# EAGLE board CT_schematic (EAGLE 7.6.0)

Size 100 x 80 mm. Coordinates in mm from the lower left corner, seen from the top.
Outline: 0,0 100,0 100,80 0,80 0,0
Copper layers (1*16): Top 0.035mm / dielectric 1.5mm / Bottom 0.035mm
Design rules "default": minimum track width 10mil, minimum drill 24mil, track to track 8mil, track to pad 8mil, pad to pad 8mil, via to via 8mil, smd to smd 8mil, copper to edge 40mil, drill to drill 8mil, minimum pad ring 10mil, minimum via ring 8mil, stop-mask expansion 4mil, vias tented up to drill 0mil, thermal gap 10mil

## Footprints (pad centres in the part's own frame; a part is rotated, then mirrored left to right if it is on the bottom)
C0603 = smd 0.8 x 0.8: 1 -0.762,0; 2 0.762,0
C0402 = smd 0.5 x 0.5: 1 -0.508,0; 2 0.508,0
C0805 = smd 1.2 x 1.3: 1 -1.016,0; 2 1.016,0
C1210 = smd 1.2 x 2.5: 1 -1.524,0; 2 1.524,0
C1206 = smd 1.3 x 1.6: 1 -1.524,0; 2 1.524,0
EXV-9H = smd 3.505 x 1.676: 1 -2.857,0; 2 2.857,0
L0603 = smd 0.8 x 0.8: 1 -0.762,0; 2 0.762,0
L1210 = smd 1.2 x 2.5: 1 -1.524,0; 2 1.524,0
PJ-037B_PACKAGE = drill 3.7 square: 1 12,0 | drill 3.2 square: 2 6,0
R0603 = smd 0.8 x 0.8: 1 -0.762,0; 2 0.762,0
WLCSP168 = smd 0.2 x 0.2: A1 -2.2,2.6; A2 -1.8,2.6; A3 -1.4,2.6; A4 -1,2.6; A5 -0.6,2.6; A6 -0.2,2.6; A7 0.2,2.6; A8 0.6,2.6; A9 1,2.6; A10 1.4,2.6; A11 1.8,2.6; A12 2.2,2.6; B1 -2.2,2.2; B2 -1.8,2.2; B3 -1.4,2.2; B4 -1,2.2; B5 -0.6,2.2; B6 -0.2,2.2; B7 0.2,2.2; B8 0.6,2.2; B9 1,2.2; B10 1.4,2.2; B11 1.8,2.2; B12 2.2,2.2; C1 -2.2,1.8; C2 -1.8,1.8; C3 -1.4,1.8; C4 -1,1.8; C5 -0.6,1.8; C6 -0.2,1.8; C7 0.2,1.8; C8 0.6,1.8; C9 1,1.8; C10 1.4,1.8; C11 1.8,1.8; C12 2.2,1.8; D1 -2.2,1.4; D2 -1.8,1.4; D3 -1.4,1.4; D4 -1,1.4; D5 -0.6,1.4; D6 -0.2,1.4; D7 0.2,1.4; D8 0.6,1.4; D9 1,1.4; D10 1.4,1.4; D11 1.8,1.4; D12 2.2,1.4; E1 -2.2,1; E2 -1.8,1; E3 -1.4,1; E4 -1,1; E5 -0.6,1; E6 -0.2,1; E7 0.2,1; E8 0.6,1; E9 1,1; E10 1.4,1; E11 1.8,1; E12 2.2,1; F1 -2.2,0.6; F2 -1.8,0.6; F3 -1.4,0.6; F4 -1,0.6; F5 -0.6,0.6; F6 -0.2,0.6; F7 0.2,0.6; F8 0.6,0.6; F9 1,0.6; F10 1.4,0.6; F11 1.8,0.6; F12 2.2,0.6; G1 -2.2,0.2; G2 -1.8,0.2; G3 -1.4,0.2; G4 -1,0.2; G5 -0.6,0.2; G6 -0.2,0.2; G7 0.2,0.2; G8 0.6,0.2; G9 1,0.2; G10 1.4,0.2; G11 1.8,0.2; G12 2.2,0.2; H1 -2.2,-0.2; H2 -1.8,-0.2; H3 -1.4,-0.2; H4 -1,-0.2; H5 -0.6,-0.2; H6 -0.2,-0.2; H7 0.2,-0.2; H8 0.6,-0.2; H9 1,-0.2; H10 1.4,-0.2; H11 1.8,-0.2; H12 2.2,-0.2; J1 -2.2,-0.6; J2 -1.8,-0.6; J3 -1.4,-0.6; J4 -1,-0.6; J5 -0.6,-0.6; J6 -0.2,-0.6; J7 0.2,-0.6; J8 0.6,-0.6; J9 1,-0.6; J10 1.4,-0.6; J11 1.8,-0.6; J12 2.2,-0.6; K1 -2.2,-1; K2 -1.8,-1; K3 -1.4,-1; K4 -1,-1; K5 -0.6,-1; K6 -0.2,-1; K7 0.2,-1; K8 0.6,-1; K9 1,-1; K10 1.4,-1; K11 1.8,-1; K12 2.2,-1; L1 -2.2,-1.4; L2 -1.8,-1.4; L3 -1.4,-1.4; L4 -1,-1.4; L5 -0.6,-1.4; L6 -0.2,-1.4; L7 0.2,-1.4; L8 0.6,-1.4; L9 1,-1.4; L10 1.4,-1.4; L11 1.8,-1.4; L12 2.2,-1.4; M1 -2.2,-1.8; M2 -1.8,-1.8; M3 -1.4,-1.8; M4 -1,-1.8; M5 -0.6,-1.8; M6 -0.2,-1.8; M7 0.2,-1.8; M8 0.6,-1.8; M9 1,-1.8; M10 1.4,-1.8; M11 1.8,-1.8; M12 2.2,-1.8; N1 -2.2,-2.2; N2 -1.8,-2.2; N3 -1.4,-2.2; N4 -1,-2.2; N5 -0.6,-2.2; N6 -0.2,-2.2; N7 0.2,-2.2; N8 0.6,-2.2; N9 1,-2.2; N10 1.4,-2.2; N11 1.8,-2.2; N12 2.2,-2.2; P1 -2.2,-2.6; P2 -1.8,-2.6; P3 -1.4,-2.6; P4 -1,-2.6; P5 -0.6,-2.6; P6 -0.2,-2.6; P7 0.2,-2.6; P8 0.6,-2.6; P9 1,-2.6; P10 1.4,-2.6; P11 1.8,-2.6; P12 2.2,-2.6
WSON-6 = smd 0.4 x 0.6: 1 -1,-1.4; 2 0,-1.4; 3 1,-1.4; 4 1,1.4; 5 0,1.4; 6 -1,1.4 | drill 0.2 pad 0.3: P$1 0.95,0; P$2 -0.95,0; P$3 0,-0.5; P$4 0,0.5 | smd 2.4 x 1.5: PAD 0,0
SSOP-20 = smd 1.651 x 0.432: 1 -3.48,2.925; 2 -3.48,2.275; 3 -3.48,1.625; 4 -3.48,0.975; 5 -3.48,0.325; 6 -3.48,-0.325; 7 -3.48,-0.975; 8 -3.48,-1.625; 9 -3.48,-2.275; 10 -3.48,-2.925; 11 3.48,-2.925; 12 3.48,-2.275; 13 3.48,-1.625; 14 3.48,-0.975; 15 3.48,-0.325; 16 3.48,0.325; 17 3.48,0.975; 18 3.48,1.625; 19 3.48,2.275; 20 3.48,2.925
HTSS-105-01-G-D = drill 1 pad 1.8 square: 1 0,0 | drill 1 pad 1.8: 2 0,2.54; 3 2.54,0; 4 2.54,2.54; 5 5.08,0; 6 5.08,2.54; 7 7.62,0; 8 7.62,2.54; 9 10.16,0; 10 10.16,2.54
LBGA-64 = smd 0.559 x 0.559: A1 -3.5,3.5; A2 -2.5,3.5; A3 -1.5,3.5; A4 -0.5,3.5; A5 0.5,3.5; A6 1.5,3.5; A7 2.5,3.5; A8 3.5,3.5; B1 -3.5,2.5; B2 -2.5,2.5; B3 -1.5,2.5; B4 -0.5,2.5; B5 0.5,2.5; B6 1.5,2.5; B7 2.5,2.5; B8 3.5,2.5; C1 -3.5,1.5; C2 -2.5,1.5; C3 -1.5,1.5; C4 -0.5,1.5; C5 0.5,1.5; C6 1.5,1.5; C7 2.5,1.5; C8 3.5,1.5; D1 -3.5,0.5; D2 -2.5,0.5; D3 -1.5,0.5; D4 -0.5,0.5; D5 0.5,0.5; D6 1.5,0.5; D7 2.5,0.5; D8 3.5,0.5; E1 -3.5,-0.5; E2 -2.5,-0.5; E3 -1.5,-0.5; E4 -0.5,-0.5; E5 0.5,-0.5; E6 1.5,-0.5; E7 2.5,-0.5; E8 3.5,-0.5; F1 -3.5,-1.5; F2 -2.5,-1.5; F3 -1.5,-1.5; F4 -0.5,-1.5; F5 0.5,-1.5; F6 1.5,-1.5; F7 2.5,-1.5; F8 3.5,-1.5; G1 -3.5,-2.5; G2 -2.5,-2.5; G3 -1.5,-2.5; G4 -0.5,-2.5; G5 0.5,-2.5; G6 1.5,-2.5; G7 2.5,-2.5; G8 3.5,-2.5; H1 -3.5,-3.5; H2 -2.5,-3.5; H3 -1.5,-3.5; H4 -0.5,-3.5; H5 0.5,-3.5; H6 1.5,-3.5; H7 2.5,-3.5; H8 3.5,-3.5
RHB32_3P45X3P45 = smd 0.85 x 0.28: 1 -2.475,1.75; 2 -2.475,1.25; 3 -2.475,0.75; 4 -2.475,0.25; 5 -2.475,-0.25; 6 -2.475,-0.75; 7 -2.475,-1.25; 8 -2.475,-1.75; 17 2.475,-1.75; 18 2.475,-1.25; 19 2.475,-0.75; 20 2.475,-0.25; 21 2.475,0.25; 22 2.475,0.75; 23 2.475,1.25; 24 2.475,1.75 | smd 0.28 x 0.85: 9 -1.75,-2.475; 10 -1.25,-2.475; 11 -0.75,-2.475; 12 -0.25,-2.475; 13 0.25,-2.475; 14 0.75,-2.475; 15 1.25,-2.475; 16 1.75,-2.475; 25 1.75,2.475; 26 1.25,2.475; 27 0.75,2.475; 28 0.25,2.475; 29 -0.25,2.475; 30 -0.75,2.475; 31 -1.25,2.475; 32 -1.75,2.475 | smd 3.45 x 3.45: 33 0,0
MICRO_USB_AB = smd 0.4 x 1.35: 1 1.3,0.26; 2 0.65,0.26; 3 0,0.26; 4 -0.65,0.26; 5 -1.3,0.26 | drill 0.6 pad 0.95 long: 6 4.175,-2.54; 7 -4.175,-2.54 | drill 0.7 pad 1.1 long: 8 -2.225,0.46; 9 2.225,0.46
SOT143B = smd 1 x 0.7: 1 -0.75,-1 | smd 0.6 x 0.7: 2 0.95,-1; 3 0.95,1; 4 -0.95,1
SOT-23-6 = smd 1.1 x 0.6: 1 -1.4,0.95; 2 -1.4,0; 3 -1.4,-0.95; 4 1.4,-0.95; 5 1.4,0; 6 1.4,0.95
QFN-28 = smd 0.813 x 0.305: 1 -2.451,1.5; 2 -2.451,1; 3 -2.451,0.5; 4 -2.451,0; 5 -2.451,-0.5; 6 -2.451,-1; 7 -2.451,-1.5; 15 2.451,-1.5; 16 2.451,-1; 17 2.451,-0.5; 18 2.451,0; 19 2.451,0.5; 20 2.451,1; 21 2.451,1.5 | smd 0.305 x 0.813: 8 -1.5,-2.451; 9 -1,-2.451; 10 -0.5,-2.451; 11 0,-2.451; 12 0.5,-2.451; 13 1,-2.451; 14 1.5,-2.451; 22 1.5,2.451; 23 1,2.451; 24 0.5,2.451; 25 0,2.451; 26 -0.5,2.451; 27 -1,2.451; 28 -1.5,2.451 | smd 3.607 x 3.607: 29 0,0
SJ-43515TS-SMT-TR = smd 2.2 x 3: 1 0.6,-7.4; 4 3.4,-7.4 | smd 3 x 3: 2 12.8,-7.4; 5 17,-3 | smd 2 x 3: 3 5.3,0; 6 2.5,0 | drill 1.8: P$7 4.5,-3.69; P$8 11.54,-3.69
ABLS-12.288MHZ-B4-T = smd 5.6 x 2.8: 1 -3.81,0; 2 5.69,0
ASEK = smd 1.4 x 1: 1 -1.1,-0.8; 2 1.1,-0.8; 3 1.1,0.8; 4 -1.1,0.8
ASFL1 = smd 1.7 x 1.5: 1 -1.27,-1.1; 2 1.27,-1.1; 3 1.27,1.1; 4 -1.27,1.1
WSON-8 = smd 0.3 x 0.6: 1 -0.75,0; 2 0.05,0; 3 0.85,0; 4 1.65,0; 5 1.65,3.8; 6 0.85,3.8; 7 0.05,3.8; 8 -0.75,3.8 | smd 3 x 2.6: PAD 0.45,1.9
SON-6 = smd 0.55 x 0.3: 1 -0.355,0.5 | smd 0.52 x 0.3: 2 -0.37,0; 3 -0.37,-0.5; 4 0.37,-0.5; 5 0.37,0; 6 0.37,0.5
SW_4-1437565-2 = smd 1.4 x 2.1: 1 -2.23,4.55; 2 -2.23,-4.55; 3 2.23,4.55; 4 2.23,-4.55
LGM67K-G1J2-24-Z = smd 0.8 x 1.4: A -2,0; C 0,0
NC7SZ125M5X = smd 1.3 x 0.7: 1 -1.3,0.95; 2 -1.3,0; 3 -1.3,-0.95; 4 1.3,-0.95; 5 1.3,0.95

## Placement (x,y rotation side)
C1  1e-06  [C0603]  -63.5,78.74 0 top  (outside the outline)
C2  1e-07  [C0603]  -67.31,78.74 0 top  (outside the outline)
C3  1e-07  [C0603]  -71.12,78.74 0 top  (outside the outline)
C4  1e-07  [C0603]  -74.93,78.74 0 top  (outside the outline)
C5  1e-07  [C0603]  -78.74,78.74 0 top  (outside the outline)
C6  1e-07  [C0603]  -82.55,78.74 0 top  (outside the outline)
C7  1e-07  [C0603]  -86.36,78.74 0 top  (outside the outline)
C8  1e-07  [C0603]  -15.24,83.82 0 top  (outside the outline)
C9  1e-07  [C0603]  -19.05,83.82 0 top  (outside the outline)
C10  1e-07  [C0603]  -22.86,83.82 0 top  (outside the outline)
C11  1e-07  [C0603]  -26.67,83.82 0 top  (outside the outline)
C12  4.7e-06  [C0603]  -44.45,78.74 0 top  (outside the outline)
C13  2.2e-06  [C0603]  -48.26,78.74 0 top  (outside the outline)
C14  2.2e-06  [C0603]  -52.07,78.74 0 top  (outside the outline)
C15  1e-08  [C0603]  -30.48,83.82 0 top  (outside the outline)
C16  1e-06  [C0603]  -34.29,83.82 0 top  (outside the outline)
C17  1e-07  [C0603]  -38.1,83.82 0 top  (outside the outline)
C18  1e-08  [C0402]  -43.18,88.9 0 top  (outside the outline)
C19  1e-06  [C0603]  -41.91,83.82 0 top  (outside the outline)
C20  1e-06  [C0603]  -45.72,83.82 0 top  (outside the outline)
C21  1e-06  [C0603]  -49.53,83.82 0 top  (outside the outline)
C22  4.7e-06  [C0805]  -27.94,68.58 0 top  (outside the outline)
C23  1e-08  [C0402]  -46.99,88.9 0 top  (outside the outline)
C24  1e-08  [C0402]  -50.8,88.9 0 top  (outside the outline)
C25  1e-07  [C0402]  -54.61,88.9 0 top  (outside the outline)
C26  2.2e-06  [C0603]  -55.88,78.74 0 top  (outside the outline)
C27  1e-07  [C0402]  -58.42,88.9 0 top  (outside the outline)
C28  1e-07  [C0402]  -62.23,88.9 0 top  (outside the outline)
C29  2.2e-06  [C0603]  -59.69,78.74 0 top  (outside the outline)
C30  1e-06  [C0603]  -53.34,83.82 0 top  (outside the outline)
C31  2.2e-05  [C1210]  -38.1,62.23 0 top  (outside the outline)
C32  2.2e-05  [C1210]  -44.45,62.23 0 top  (outside the outline)
C33  1e-09  [C0402]  -66.04,88.9 0 top  (outside the outline)
C34  1e-09  [C0402]  -69.85,88.9 0 top  (outside the outline)
C35  1e-07  [C0402]  -73.66,88.9 0 top  (outside the outline)
C36  1e-07  [C0402]  -77.47,88.9 0 top  (outside the outline)
C37  1e-07  [C0402]  -81.28,88.9 0 top  (outside the outline)
C38  1e-07  [C0402]  -85.09,88.9 0 top  (outside the outline)
C39  1e-07  [C0402]  -88.9,88.9 0 top  (outside the outline)
C40  1e-05  [C0805]  -33.02,68.58 0 top  (outside the outline)
C41  1e-05  [C0805]  -38.1,68.58 0 top  (outside the outline)
C42  1e-05  [C0805]  -43.18,68.58 0 top  (outside the outline)
C43  1e-05  [C0805]  -48.26,68.58 0 top  (outside the outline)
C44  1e-05  [C0805]  -53.34,68.58 0 top  (outside the outline)
C45  2.2e-11  [C0402]  -35.56,88.9 0 top  (outside the outline)
C46  2.2e-11  [C0402]  -39.37,88.9 0 top  (outside the outline)
C47  1e-08  [C0402]  -15.24,93.98 0 top  (outside the outline)
C48  1e-08  [C0402]  -19.05,93.98 0 top  (outside the outline)
C49  1e-08  [C0402]  -22.86,93.98 0 top  (outside the outline)
C50  1e-06  [C0603]  -57.15,83.82 0 top  (outside the outline)
C51  1e-05  [C0805]  -58.42,68.58 0 top  (outside the outline)
C52  1e-08  [C0402]  -26.67,93.98 0 top  (outside the outline)
C53  1e-05  [C1206]  -69.85,60.96 0 top  (outside the outline)
C54  1e-05  [C1210]  -50.8,62.23 0 top  (outside the outline)
C55  1e-08  [C0402]  -30.48,93.98 0 top  (outside the outline)
C56  1e-05  [C1206]  -76.2,60.96 0 top  (outside the outline)
C57  1e-05  [C1210]  -57.15,62.23 0 top  (outside the outline)
C58  1e-07  [C0402]  -34.29,93.98 0 top  (outside the outline)
C59  0.0001  [EXV-9H]  -38.1,54.61 0 top  (outside the outline)
C60  0.0001  [EXV-9H]  -49.53,54.61 0 top  (outside the outline)
C61  1e-08  [C0402]  -38.1,93.98 0 top  (outside the outline)
C62  1e-08  [C0402]  -41.91,93.98 0 top  (outside the outline)
C63  1e-08  [C0402]  -45.72,93.98 0 top  (outside the outline)
F1  240.0  [L0603]  -60.96,83.82 0 top  (outside the outline)
I1  1.5e-05  [L1210]  -63.5,62.23 0 top  (outside the outline)
J1  PJ-037B  [PJ-037B_PACKAGE]  -27.94,24.13 0 top  (outside the outline)
R2  1000.0  [R0603]  -64.77,83.82 0 top  (outside the outline)
R4  4700.0  [R0603]  -68.58,83.82 0 top  (outside the outline)
R5  4700.0  [R0603]  -72.39,83.82 0 top  (outside the outline)
R6  4700.0  [R0603]  -76.2,83.82 0 top  (outside the outline)
R7  2200.0  [R0603]  -80.01,83.82 0 top  (outside the outline)
R8  2200.0  [R0603]  -83.82,83.82 0 top  (outside the outline)
R9  10000.0  [R0603]  -35.56,73.66 0 top  (outside the outline)
R10  10000.0  [R0603]  -40.64,73.66 0 top  (outside the outline)
R11  10000.0  [R0603]  -45.72,73.66 0 top  (outside the outline)
R12  100000.0  [R0603]  -63.5,68.58 0 top  (outside the outline)
R13  100000.0  [R0603]  -68.58,68.58 0 top  (outside the outline)
R14  100000.0  [R0603]  -73.66,68.58 0 top  (outside the outline)
R15  10000.0  [R0603]  -50.8,73.66 0 top  (outside the outline)
R16  10000.0  [R0603]  -55.88,73.66 0 top  (outside the outline)
R17  10000.0  [R0603]  -60.96,73.66 0 top  (outside the outline)
R18  10000.0  [R0603]  -66.04,73.66 0 top  (outside the outline)
R19  10000.0  [R0603]  -71.12,73.66 0 top  (outside the outline)
R20  47000.0  [R0603]  -76.2,73.66 0 top  (outside the outline)
R21  10000.0  [R0603]  -81.28,73.66 0 top  (outside the outline)
R22  10000.0  [R0603]  -86.36,73.66 0 top  (outside the outline)
R23  47000.0  [R0603]  -15.24,78.74 0 top  (outside the outline)
R24  47000.0  [R0603]  -20.32,78.74 0 top  (outside the outline)
R25  47000.0  [R0603]  -25.4,78.74 0 top  (outside the outline)
R26  680.0  [R0603]  -87.63,83.82 0 top  (outside the outline)
R27  100000.0  [R0603]  -78.74,68.58 0 top  (outside the outline)
R28  36000.0  [R0603]  -30.48,78.74 0 top  (outside the outline)
R29  100000.0  [R0603]  -83.82,68.58 0 top  (outside the outline)
R30  100000.0  [R0603]  -15.24,73.66 0 top  (outside the outline)
R31  2231.0  [R0603]  -15.24,88.9 0 top  (outside the outline)
R32  1000.0  [R0603]  -19.05,88.9 0 top  (outside the outline)
R33  100000.0  [R0603]  -20.32,73.66 0 top  (outside the outline)
R34  3900.0  [R0603]  -22.86,88.9 0 top  (outside the outline)
R35  1000.0  [R0603]  -26.67,88.9 0 top  (outside the outline)
R36  10000.0  [R0603]  -35.56,78.74 0 top  (outside the outline)
R37  10000.0  [R0603]  -40.64,78.74 0 top  (outside the outline)
R38  9100.0  [R0603]  -30.48,88.9 0 top  (outside the outline)
R39  680000.0  [R0603]  -25.4,73.66 0 top  (outside the outline)
R40  120000.0  [R0603]  -30.48,73.66 0 top  (outside the outline)
U1  STM32F469AGY6TR  [WLCSP168]  -76.2,21.59 0 top  (outside the outline)
U2  HDC1080DMBR  [WSON-6]  -68.58,45.72 0 top  (outside the outline)
U3  MAX3218EAP+T  [SSOP-20]  -36.83,35.56 0 top  (outside the outline)
U4  HTSS-105-01-G-D  [HTSS-105-01-G-D]  -27.94,35.56 0 top  (outside the outline)
U5  mt28ew512aba1HPC-0AAT  [LBGA-64]  -19.05,7.62 0 top  (outside the outline)
U6  TUSB1210BRHBR  [RHB32_3P45X3P45]  -78.74,54.61 0 top  (outside the outline)
U7  47590-0001  [MICRO_USB_AB]  -36.83,24.13 0 top  (outside the outline)
U8  prtr5v0u2ax  [SOT143B]  -58.42,93.98 0 top  (outside the outline)
U9  MAX4995AAUT+T  [SOT-23-6]  -81.28,60.96 0 top  (outside the outline)
U10  WM8731CLSEFL  [QFN-28]  -30.48,62.23 0 top  (outside the outline)
U11  SJ-43515TS-SMT-TR  [SJ-43515TS-SMT-TR]  -53.34,10.16 0 top  (outside the outline)
U12  SJ-43515TS-SMT-TR  [SJ-43515TS-SMT-TR]  -81.28,10.16 0 top  (outside the outline)
U13  ABLS-12.288MHZ-B4-T  [ABLS-12.288MHZ-B4-T]  -67.31,54.61 0 top  (outside the outline)
U14  ASEK-32.768KHz-ECST  [ASEK]  -29.21,54.61 0 top  (outside the outline)
U15  ASFL1-25MHZ-NCS  [ASFL1]  -45.72,45.72 0 top  (outside the outline)
U16  ASFL1-26MHZ-NCS  [ASFL1]  -62.23,45.72 0 top  (outside the outline)
U17  LP2951ACSDX/NOPB  [WSON-8]  -29.21,44.45 0 top  (outside the outline)
U18  LP3878SDX-ADJ/NOPB  [WSON-8]  -59.69,34.29 0 top  (outside the outline)
U19  LP3878SDX-ADJ/NOPB  [WSON-8]  -80.01,34.29 0 top  (outside the outline)
U20  TPS3895ADRYR  [SON-6]  -62.23,92.71 0 top  (outside the outline)
U21  4-1437565-2  [SW_4-1437565-2]  -57.15,22.86 0 top  (outside the outline)
U22  Q65110A2395  [LGM67K-G1J2-24-Z]  -17.78,62.23 0 top  (outside the outline)
U23  nc7sz125m5x  [NC7SZ125M5X]  -86.36,60.96 0 top  (outside the outline)
U24  nc7sz125m5x  [NC7SZ125M5X]  -15.24,67.31 0 top  (outside the outline)
U25  nc7sz125m5x  [NC7SZ125M5X]  -21.59,67.31 0 top  (outside the outline)

## Library data of the parts
C1-C63 F1 I1 J1 R2 R4-R40 U1-U25 = circuit_tree

## Nets
CLK_CRYSTAL_U10_1: C45.1 U10.1 U13.1
CLK_CRYSTAL_U10_2: C46.1 U10.2 U13.2
CLK_U1_E11: U1.E11 U14.3
CLK_U1_K11: U1.K11 U15.3
CLK_U6_1: U6.1 U16.3
GND: C1.2 C2.2 C3.2 C4.2 C5.2 C6.2 C7.2 C8.2 C9.2 C10.2 C11.2 C12.2 C13.2 C14.2 C15.2 C16.2 C17.2 C18.2 C19.2 C20.2 C21.2 C23.2 C24.2 C25.2 C26.2 C27.2 C28.2 C29.2 C30.2 C34.2 C35.2 C36.2 C37.2 C38.2 C39.2 C40.2 C41.2 C42.2 C43.2 C44.2 C45.2 C46.2 C47.2 C48.2 C49.2 C50.2 C51.2 C52.2 C53.2 C54.2 C55.2 C56.2 C57.2 C58.2 C59.2 C60.2 C61.2 C62.2 C63.2 J1.2 R2.2 R20.2 R23.2 R24.2 R25.2 R29.2 R32.2 R35.2 R38.2 R40.2 U1.A4 U1.B7 U1.B10 U1.C1 U1.F2 U1.F12 U1.H1 U1.H7 U1.J11 U1.L11 U1.M1 U1.N8 U1.N11 U1.P4 U2.2 U2.PAD U3.5 U3.17 U3.20 U4.9 U5.E8 U5.H2 U5.H7 U6.33 U7.5 U7.6 U7.7 U7.8 U7.9 U8.1 U9.2 U10.4 U10.15 U10.19 U10.25 U10.26 U10.29 U11.1 U12.1 U14.2 U15.2 U16.2 U17.3 U17.4 U17.PAD U18.3 U18.PAD U19.3 U19.PAD U20.2 U22.C U23.1 U23.3 U24.1 U24.3 U25.1 U25.3
NET_U1_A9: R8.1 U1.A9 U2.1
NET_U1_B9: R7.1 U1.B9 U2.6
NET_U1_D2: C14.1 U1.D2
NET_U1_D9: R9.1 U1.D9
NET_U1_F8: R10.1 U1.F8
NET_U1_H9: R5.1 U1.H9 U24.4
NET_U1_K1: U1.K1
NET_U1_K2: U1.K2
NET_U1_M12: C15.1 C16.1 F1.1 U1.M12
NET_U1_N4: C13.1 U1.N4
NET_U1_P9: R11.1 U1.P9
NET_U1_P10: U22.A
NET_U1_P11: U21.3 U21.4
NET_U3_1: I1.1 U3.1
NET_U3_2: R12.1 U3.2
NET_U3_3: R13.1 U3.3
NET_U3_4: R14.1 U3.4
NET_U3_15: C21.1 U3.15
NET_U3_16: C22.2 U3.16
NET_U3_18: C22.1 U3.18
NET_U3_19: C20.1 U3.19
NET_U4_3: U3.12 U4.3
NET_U4_4: U3.11 U4.4
NET_U4_5: U3.14 U4.5
NET_U4_6: U3.13 U4.6
NET_U5_B4: R18.1 U5.B4
NET_U5_B5: R4.1 U5.B5 U23.4
NET_U6_11: R21.1 U6.11
NET_U6_12: C29.1 U6.12
NET_U6_14: R22.1 U6.14
NET_U6_20: C26.1 U6.20
NET_U6_27: R6.1 U6.27 U25.4
NET_U7_1: C30.1 U6.22 U7.1 U8.4 U9.1
NET_U7_2: U6.19 U7.2 U8.3
NET_U7_3: U6.18 U7.3 U8.2
NET_U7_4: U6.23 U7.4
NET_U9_3: R20.1 U9.3
NET_U9_4: U6.17 U9.4
NET_U10_9: U10.9
NET_U10_20: C39.1 C44.1 U10.20
NET_U11_2: C32.1 R24.1 U11.2
NET_U11_5: C31.1 R23.1 U11.5
NET_U11_13: C31.2
NET_U11_14: C32.2
NET_U12_5: C33.1 C34.1 R25.1 R26.1 U12.5
NET_U12_21: R26.2
NET_U12_22: C33.2
NET_U17_5: R27.1 U17.5
NET_U17_7: R28.2 R29.1 U17.7
NET_U18_1: C52.1 U18.1
NET_U18_6: R31.2 R32.1 U18.6
NET_U18_8: R30.1 U18.8
NET_U19_1: C55.1 U19.1
NET_U19_6: R34.2 R35.1 U19.6
NET_U19_8: R33.1 U19.8
NET_U20_1: R37.1 R38.1 U20.1
NET_U20_3: R39.2 R40.1 U20.3
NET_U20_4: R36.1 U20.4 U23.2 U24.2 U25.2
NET_U21_1: R2.1 U21.1 U21.2
PROC_FMC_A0: U1.G10 U5.E2
PROC_FMC_A1: U1.H10 U5.D2
PROC_FMC_A2: U1.G12 U5.C2
PROC_FMC_A3: U1.H11 U5.A2
PROC_FMC_A4: U1.J10 U5.B2
PROC_FMC_A5: U1.H12 U5.D3
PROC_FMC_A6: U1.M8 U5.C3
PROC_FMC_A7: U1.J7 U5.A3
PROC_FMC_A8: U1.L7 U5.B6
PROC_FMC_A9: U1.H8 U5.A6
PROC_FMC_A10: U1.J6 U5.C6
PROC_FMC_A11: U1.P7 U5.D6
PROC_FMC_A12: U1.G5 U5.B7
PROC_FMC_A13: U1.G4 U5.A7
PROC_FMC_A14: U1.G2 U5.C7
PROC_FMC_A15: U1.G1 U5.D7
PROC_FMC_A16: U1.J4 U5.E7
PROC_FMC_A17: U1.M2 U5.B3
PROC_FMC_A18: U1.H4 U5.C4
PROC_FMC_A19: U1.E10 U5.D5
PROC_FMC_A20: U1.C11 U5.D4
PROC_FMC_A21: U1.B12 U5.C5
PROC_FMC_A22: U1.D11 U5.B8
PROC_FMC_A23: U1.F9 U5.C8
PROC_FMC_A24: U1.E8 U5.F8
PROC_FMC_D0: U1.L3 U5.E3
PROC_FMC_D1: U1.L2 U5.H3
PROC_FMC_D2: U1.E6 U5.E4
PROC_FMC_D3: U1.A3 U5.H4
PROC_FMC_D4: U1.N7 U5.H5
PROC_FMC_D5: U1.M7 U5.E5
PROC_FMC_D6: U1.K6 U5.H6
PROC_FMC_D7: U1.P6 U5.E6
PROC_FMC_D8: U1.N6 U5.F3
PROC_FMC_D9: U1.M6 U5.G3
PROC_FMC_D10: U1.L6 U5.F4
PROC_FMC_D11: U1.J5 U5.G4
PROC_FMC_D12: U1.P5 U5.F5
PROC_FMC_D13: U1.L4 U5.G6
PROC_FMC_D14: U1.N1 U5.F6
PROC_FMC_D15: U1.M3 U5.G7
PROC_FMC_NBL0: R19.1 U1.A10 U5.F7
PROC_FMC_NE2: R15.1 U1.D7 U5.F2
PROC_FMC_NOE: R16.1 U1.B4 U5.G2
PROC_FMC_NWAIT: U1.E7 U5.A4
PROC_FMC_NWE: R17.1 U1.C6 U5.A5
PROC_I2S2_CK: U1.C3 U10.7
PROC_I2S2_EXT_SD: U1.A1 U10.10
PROC_I2S2_SD: U1.B2 U10.8
PROC_I2S2_WS: U1.E5 U10.9 U10.11
PROC_UART4_RX: U1.B3 U3.9
PROC_UART4_TX: U1.D5 U3.7
VCC_S1_7V1: C50.1 C53.1 C56.1 C59.1 C60.1 J1.1 R30.2 R33.2 U17.8 U18.4 U19.4
VCC_TIER1_1V8: C25.1 C27.1 C28.1 C35.1 C37.1 C38.1 C40.1 C42.1 C43.1 C51.1 C61.1 C62.1 C63.1 R6.2 R21.2 R22.2 R27.2 R28.1 U6.21 U6.28 U6.30 U6.32 U10.5 U10.12 U10.18 U17.1 U23.5 U24.5 U25.5
VCC_TIER1_3V3: C1.1 C2.1 C3.1 C4.1 C5.1 C6.1 C7.1 C8.1 C9.1 C10.1 C11.1 C12.1 C17.1 C18.1 C19.1 C23.1 C24.1 C36.1 C41.1 C47.1 C48.1 C49.1 C54.1 C58.1 F1.2 I1.2 R4.2 R5.2 R7.2 R8.2 R9.2 R10.2 R11.2 R12.2 R13.2 R14.2 R15.2 R16.2 R17.2 R18.2 R19.2 R31.1 R36.2 R37.2 R39.1 U1.A7 U1.A11 U1.B5 U1.C2 U1.C12 U1.F1 U1.G11 U1.J12 U1.L1 U1.P3 U1.P8 U1.P12 U2.5 U3.6 U5.D8 U5.F1 U5.G5 U10.3 U14.4 U15.4 U16.4 U18.5 U20.6
VCC_TIER1_5V0: C57.1 R34.1 U9.5 U19.5

## Tracks (layer width: path | path; a pad name or v marks a point on that pad's centre or on a via)
CLK_CRYSTAL_U10_1  (2 unrouted)
CLK_CRYSTAL_U10_2  (2 unrouted)
CLK_U1_E11  (1 unrouted)
CLK_U1_K11  (1 unrouted)
CLK_U6_1  (1 unrouted)
GND  (126 unrouted)
NET_U1_A9  (2 unrouted)
NET_U1_B9  (2 unrouted)
NET_U1_D2  (1 unrouted)
NET_U1_D9  (1 unrouted)
NET_U1_F8  (1 unrouted)
NET_U1_H9  (2 unrouted)
NET_U1_M12  (3 unrouted)
NET_U1_N4  (1 unrouted)
NET_U1_P9  (1 unrouted)
NET_U1_P11  (1 unrouted)
NET_U3_1  (1 unrouted)
NET_U3_2  (1 unrouted)
NET_U3_3  (1 unrouted)
NET_U3_4  (1 unrouted)
NET_U3_15  (1 unrouted)
NET_U3_16  (1 unrouted)
NET_U3_18  (1 unrouted)
NET_U3_19  (1 unrouted)
NET_U4_3  (1 unrouted)
NET_U4_4  (1 unrouted)
NET_U4_5  (1 unrouted)
NET_U4_6  (1 unrouted)
NET_U5_B4  (1 unrouted)
NET_U5_B5  (2 unrouted)
NET_U6_11  (1 unrouted)
NET_U6_12  (1 unrouted)
NET_U6_14  (1 unrouted)
NET_U6_20  (1 unrouted)
NET_U6_27  (2 unrouted)
NET_U7_1  (4 unrouted)
NET_U7_2  (2 unrouted)
NET_U7_3  (2 unrouted)
NET_U7_4  (1 unrouted)
NET_U9_3  (1 unrouted)
NET_U9_4  (1 unrouted)
NET_U10_20  (2 unrouted)
NET_U11_2  (2 unrouted)
NET_U11_5  (2 unrouted)
NET_U12_5  (4 unrouted)
NET_U17_5  (1 unrouted)
NET_U17_7  (2 unrouted)
NET_U18_1  (1 unrouted)
NET_U18_6  (2 unrouted)
NET_U18_8  (1 unrouted)
NET_U19_1  (1 unrouted)
NET_U19_6  (2 unrouted)
NET_U19_8  (1 unrouted)
NET_U20_1  (2 unrouted)
NET_U20_3  (2 unrouted)
NET_U20_4  (4 unrouted)
NET_U21_1  (2 unrouted)
PROC_FMC_A0  (1 unrouted)
PROC_FMC_A1  (1 unrouted)
PROC_FMC_A2  (1 unrouted)
PROC_FMC_A3  (1 unrouted)
PROC_FMC_A4  (1 unrouted)
PROC_FMC_A5  (1 unrouted)
PROC_FMC_A6  (1 unrouted)
PROC_FMC_A7  (1 unrouted)
PROC_FMC_A8  (1 unrouted)
PROC_FMC_A9  (1 unrouted)
PROC_FMC_A10  (1 unrouted)
PROC_FMC_A11  (1 unrouted)
PROC_FMC_A12  (1 unrouted)
PROC_FMC_A13  (1 unrouted)
PROC_FMC_A14  (1 unrouted)
PROC_FMC_A15  (1 unrouted)
PROC_FMC_A16  (1 unrouted)
PROC_FMC_A17  (1 unrouted)
PROC_FMC_A18  (1 unrouted)
PROC_FMC_A19  (1 unrouted)
PROC_FMC_A20  (1 unrouted)
PROC_FMC_A21  (1 unrouted)
PROC_FMC_A22  (1 unrouted)
PROC_FMC_A23  (1 unrouted)
PROC_FMC_A24  (1 unrouted)
PROC_FMC_D0  (1 unrouted)
PROC_FMC_D1  (1 unrouted)
PROC_FMC_D2  (1 unrouted)
PROC_FMC_D3  (1 unrouted)
PROC_FMC_D4  (1 unrouted)
PROC_FMC_D5  (1 unrouted)
PROC_FMC_D6  (1 unrouted)
PROC_FMC_D7  (1 unrouted)
PROC_FMC_D8  (1 unrouted)
PROC_FMC_D9  (1 unrouted)
PROC_FMC_D10  (1 unrouted)
PROC_FMC_D11  (1 unrouted)
PROC_FMC_D12  (1 unrouted)
PROC_FMC_D13  (1 unrouted)
PROC_FMC_D14  (1 unrouted)
PROC_FMC_D15  (1 unrouted)
PROC_FMC_NBL0  (2 unrouted)
PROC_FMC_NE2  (2 unrouted)
PROC_FMC_NOE  (2 unrouted)
PROC_FMC_NWAIT  (1 unrouted)
PROC_FMC_NWE  (2 unrouted)
PROC_I2S2_CK  (1 unrouted)
PROC_I2S2_EXT_SD  (1 unrouted)
PROC_I2S2_SD  (1 unrouted)
PROC_I2S2_WS  (2 unrouted)
PROC_UART4_RX  (1 unrouted)
PROC_UART4_TX  (1 unrouted)
VCC_S1_7V1  (10 unrouted)
VCC_TIER1_1V8  (28 unrouted)
VCC_TIER1_3V3  (67 unrouted)
VCC_TIER1_5V0  (3 unrouted)